# Altium PCB wakerdimmer.pcbdoc (part 2 of 2)
Units mil, origin at the board's own origin, x right, y up, seen from the top; angles counter-clockwise.
Board outline 8825.01 x 3314.36 mil, 2 copper layers (Top Layer, Bottom Layer); 48 components, 82 nets, 207 pads, 61 vias.
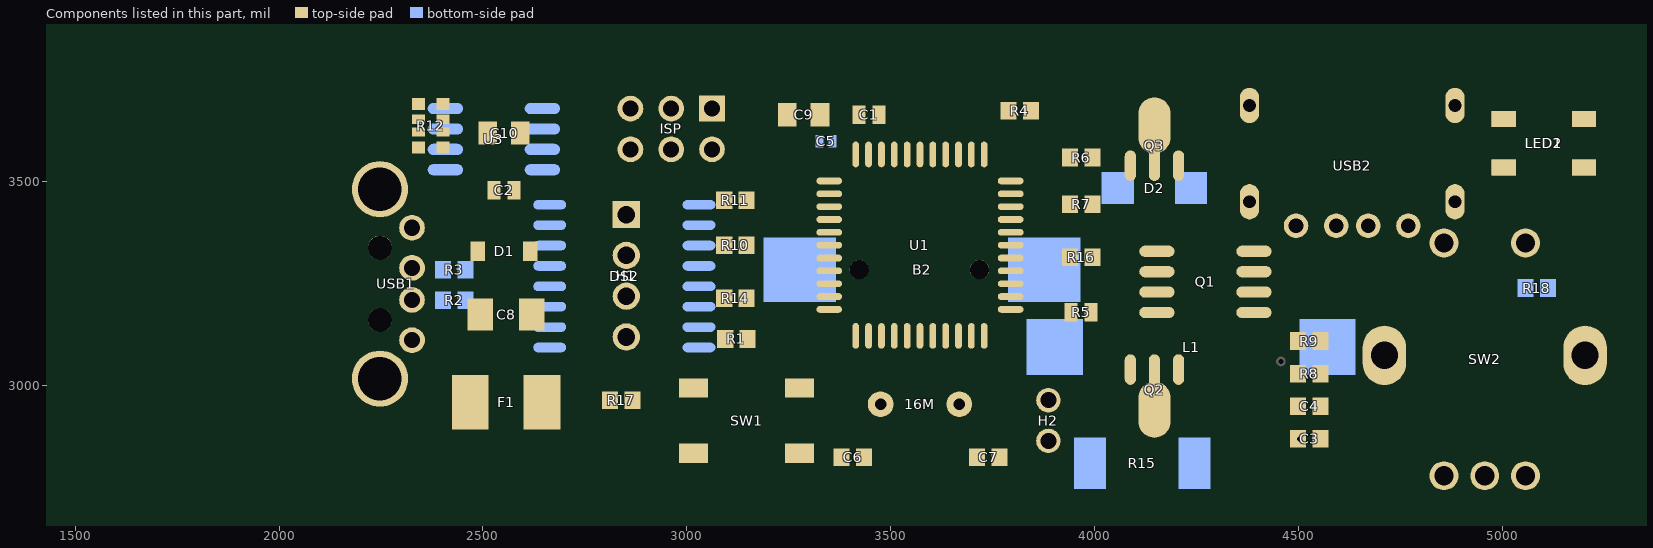
[diagram p2: the components of this part, seen from the top]

## Other copper (continued)
Bottom Layer:
  region net VCC: 2324.06,3079.23 2357.49,3112.62 2374.04,3097.99 2338.67,3062.66
  region net USB1_2: 2346.81,3232.76 2346.76,3185.51 2368.83,3205.11 2368.84,3213.11
  region net USB1_3: 2346.91,3311.46 2346.85,3264.21 2365.46,3283.81 2365.47,3291.81
  region net U1_13: 2850.51,3649.06 2833.85,3693.27 2819.22,3669.55 2823.87,3657.22
  region net U1_10: 2959.7,3547.08 2993.11,3580.48 2996.23,3552.43 2987.75,3543.95
  region net U1_9: 2959.7,3647.08 2993.11,3680.48 2996.23,3652.43 2987.75,3643.95
  region net SW2_A: 4861.7,2813.14 4821.24,2778.68 4820.81,2810.89 4829.97,2818.7
  region net U1_21: 5083.25,3325.5 5030.1,3325.5 5051.67,3300.7 5061.67,3300.7
  region net DS2_16: 2849.58,3285.11 2885.07,3320.61 2886.72,3289.12 2881.06,3283.47
  region net DS2_16: 2818.27,3316.41 2853.77,3351.91 2822.99,3354.26 2815.92,3347.19
  region net FUSED: 2818.27,3220.61 2853.77,3185.11 2822.28,3183.47 2816.63,3189.12
  region net U1_20: 3856.73,2861.63 3888.55,2893.45 3860.62,2895.22 3854.96,2889.56
  region net L1_2: 4790.42,3369.39 4745.55,3372.75 4741.67,3355.38 4791.67,3351.64
  region net L1_2: 4790.56,3412.2 4745.66,3409.12 4741.67,3429.89 4791.67,3433.32
  region net U1_26: 4447.67,3050.57 4465.67,3050.57 4462.67,3042.17 4450.67,3042.17
  region net U1_26: 4457.42,3046.53 4444.69,3059.26 4442.29,3049.79 4447.95,3044.13
  region net U1_26: 4502.42,2880.49 4489.69,2867.76 4485.88,2875.82 4494.36,2884.3
  region net U1_6: 3467.66,3476.45 3485.68,3476.45 3480.67,3483.51 3472.67,3483.51
  region net VCC: 4037.02,3379.4 4037.02,3397.42 4045.42,3398.41 4045.42,3378.41
  region net VCC: 4037.02,3379.4 4037.02,3397.42 4045.42,3392.41 4045.42,3384.41
  region net VCC: 4020.07,3380.47 4038.08,3380.47 4039.07,3372.06 4019.07,3372.06
  region net SW2_A: 4663.65,2989.26 4650.92,2976.53 4658.98,2972.72 4667.47,2981.2
  region net DS2_14: 3188.65,3664.26 3175.92,3651.53 3185.39,3649.13 3191.05,3654.79
  region net U1_9: 3242.42,3550.49 3229.69,3537.76 3225.88,3545.82 3234.36,3554.3
  region net U1_10: 3203.73,3504.51 3203.73,3522.51 3195.33,3519.51 3195.33,3507.51
  region net U1_13: 2717.67,3256.45 2735.67,3256.45 2732.67,3264.85 2720.67,3264.85
  region net U1_13: 2748.65,2994.26 2735.92,2981.53 2743.98,2977.72 2752.47,2986.2
  region net U1_13: 3183.73,2854.51 3183.73,2872.51 3175.33,2869.51 3175.33,2857.51
  region net U1_12: 3902.42,3491.53 3889.69,3504.26 3885.88,3496.2 3894.36,3487.72
  region net U1_12: 3375.81,3118.98 3392.79,3113.02 3393.36,3121.72 3380.81,3126.13
  region net U1_11: 3127.67,3551.45 3145.67,3551.45 3142.67,3559.85 3130.67,3559.85
  region net U1_11: 3127.67,3590.57 3145.67,3590.57 3142.67,3582.17 3130.67,3582.17
  region net U1_32: 4367.42,3100.49 4354.69,3087.76 4352.29,3097.23 4357.95,3102.89
  region net U1_32: 4287.67,3290.57 4305.67,3290.57 4300.67,3282.17 4292.67,3282.17
  region net U1_26: 4268.65,3027.76 4255.92,3040.49 4265.39,3042.89 4271.05,3037.23
  region net U1_4: 2553.73,3394.51 2553.73,3412.51 2545.33,3407.51 2545.33,3399.51
  region net U1_4: 2937.67,3490.57 2955.67,3490.57 2950.67,3482.17 2942.67,3482.17
  region net U1_4: 2937.67,3391.45 2955.67,3391.45 2950.67,3399.85 2942.67,3399.85
  region net U1_4: 3113.65,3397.76 3100.92,3410.49 3110.39,3412.89 3116.05,3407.23
  region net U1_4: 3273.73,3429.51 3273.73,3447.51 3265.33,3442.51 3265.33,3434.51
  region net U1_3: 2970.9,3026.53 2959.89,3040.77 2955.66,3032.51 2961.85,3024.51
  region net U1_3: 3056.98,3042.37 3051.47,3059.51 3060.94,3057.51 3063.51,3049.51
  region net U1_3: 3417.42,3446.53 3404.69,3459.26 3402.29,3449.79 3407.95,3444.13
  region net U1_36: 4938.73,3525.41 4938.73,3543.41 4930.33,3538.41 4930.33,3530.41
  region net U1_36: 3657.17,3660.57 3675.17,3660.57 3670.17,3652.17 3662.17,3652.17
  region net U1_36: 3660.56,3679.12 3677.4,3672.75 3676.06,3682.24 3667.85,3685.34
  region net DO: 5212.42,3581.53 5199.69,3594.26 5197.29,3584.79 5202.95,3579.13
  region net FUSED: 5038.73,3459.51 5038.73,3477.51 5030.33,3478.51 5030.33,3458.51
  region net DS2_15: 2777.67,3550.57 2795.67,3550.57 2791.67,3542.17 2781.67,3542.17
  region net DS2_15: 2708.73,3669.51 2708.73,3687.51 2700.33,3683.51 2700.33,3673.51
  region net DS2_16: 2747.67,3495.57 2765.67,3495.57 2761.67,3487.17 2751.67,3487.17
  region net DS2_16: 2708.73,3619.51 2708.73,3637.51 2700.33,3633.51 2700.33,3623.51
  region net FUSED: 2632.67,3496.45 2650.67,3496.45 2646.67,3504.85 2636.67,3504.85
  region net U3_3: 2327.67,3725.57 2345.67,3725.57 2341.67,3717.17 2331.67,3717.17
  region net U3_2: 2462.67,3725.57 2480.67,3725.57 2476.67,3717.17 2466.67,3717.17
  region net U3_1: 2393.65,3482.76 2380.92,3495.49 2389.69,3498.6 2396.76,3491.53
  region net U1_4: 2471.67,3305.21 2451.67,3305.21 2457.67,3317.21 2465.67,3317.21
  region net USB1_3: 2381.87,3293.51 2381.87,3273.51 2369.87,3279.51 2369.87,3287.51
  region net U1_3: 2476.47,3204.86 2467.85,3186.81 2478.45,3181.17 2482.11,3188.83
  region net USB1_2: 2381.97,3218.51 2381.97,3198.51 2369.97,3204.51 2369.97,3212.51
  region net U1_6: 3346.87,3582.81 3366.47,3582.81 3360.67,3570.81 3352.67,3570.81
  region net VCC: 3970.97,3031.01 3970.97,3156.01 3991.67,3118.51 3991.67,3068.51
  region net VCC: 3970.97,3162.41 3930.57,3162.41 3971.43,3192.41 3999.71,3192.41
  region net L1_2: 4638.07,3162.41 4513.07,3162.41 4615.21,3237.41 4685.93,3237.41
  region net L1_2: 4197.27,3522.91 4276.07,3444.11 4307.38,3518.87 4272.03,3554.22
  region net VCC: 4031.67,3444.11 4081.67,3444.11 4066.67,3414.11 4046.67,3414.11
  region net VCC: 4046.67,3444.11 4066.67,3444.11 4060.67,3432.11 4052.67,3432.11
  region net DS2_14: 3295.37,3362.21 3275.37,3362.21 3291.72,3374.21 3303.03,3374.21
  region net DS2_14: 3188.07,3253.51 3188.07,3233.51 3181.67,3239.51 3181.67,3247.51
  region net FUSED: 4978.25,3514.81 5028.25,3514.81 5013.25,3484.81 4993.25,3484.81
  region net DO: 5210.07,3554.11 5190.07,3554.11 5196.07,3566.11 5204.07,3566.11
  region net U1_21: 5069.17,3260.21 5044.17,3260.21 5051.67,3275.21 5061.67,3275.21
  region net VCC: 3949.37,2841.01 3949.37,2745.51 3874.37,2753.51 3874.37,2803.51
  region net VCC: 4027.97,2871.51 3949.37,2871.51 3966.67,2946.51 4016.67,2946.51
  region net U1_4: 2471.67,3305.16 2451.67,3305.16 2457.67,3317.16 2465.67,3317.16
  region net USB1_3: 2381.87,3293.51 2381.87,3273.51 2369.87,3279.51 2369.87,3287.51
  region net U1_3: 2476.48,3204.83 2467.7,3186.86 2478.34,3181.29 2482.05,3188.89
  region net USB1_2: 2381.99,3218.51 2381.99,3198.51 2369.99,3204.51 2369.99,3212.51
  region net U1_6: 3346.83,3582.76 3366.51,3582.76 3360.67,3570.76 3352.67,3570.76
  region net VCC: 3970.97,3031.01 3970.97,3156.01 3991.67,3118.51 3991.67,3068.51
  region net VCC: 3970.97,3162.41 3930.57,3162.41 3971.43,3192.41 3999.71,3192.41
  region net L1_2: 4638.07,3162.41 4513.07,3162.41 4615.21,3237.41 4685.93,3237.41
  region net L1_2: 4197.3,3522.88 4276.04,3444.14 4307.38,3518.87 4272.03,3554.22
  region net VCC: 4031.67,3444.14 4081.67,3444.14 4066.67,3414.14 4046.67,3414.14
  region net VCC: 4046.67,3444.14 4066.67,3444.14 4060.67,3432.14 4052.67,3432.14
  region net DS2_14: 3295.41,3362.25 3275.41,3362.25 3291.75,3374.25 3303.07,3374.25
  region net DS2_14: 3188.09,3253.51 3188.09,3233.51 3181.67,3239.51 3181.67,3247.51
  region net FUSED: 4978.25,3514.81 5028.25,3514.81 5013.25,3484.81 4993.25,3484.81
  region net DO: 5210.07,3554.11 5190.07,3554.11 5196.07,3566.11 5204.07,3566.11
  region net U1_21: 5069.17,3260.16 5044.17,3260.16 5051.67,3275.16 5061.67,3275.16
  region net VCC: 3949.32,2841.01 3949.32,2745.51 3874.32,2753.51 3874.32,2803.51
  region net VCC: 4028.02,2871.51 3949.32,2871.51 3966.67,2946.51 4016.67,2946.51
  region net DS2_15: 2861.67,3385.05 2841.67,3385.05 2847.67,3373.05 2855.67,3373.05
  region net DS2_15: 2818.21,3434.3 2835.89,3451.97 2819.98,3457.27 2812.91,3450.2
  region net DS2_14: 3064.57,3182.61 3064.57,3202.61 3076.57,3196.61 3076.57,3188.61
  region net DS2_15: 2991.02,3148.61 3010.16,3154.42 2993.82,3166.42 2982.5,3166.42
  region net DS2_16: 2992.77,3100.89 3012.46,3104.42 2996.12,3116.42 2984.8,3116.42
  region net U1_20: 2698.43,3182.61 2698.43,3202.61 2710.43,3196.61 2710.43,3188.61
  region net FUSED: 2698.43,3132.61 2698.43,3152.61 2710.43,3146.61 2710.43,3138.61
  region net U3_1: 2420.17,3514.73 2395.17,3514.73 2402.67,3509.51 2412.67,3509.51
  region net U3_2: 2443,3566.01 2443,3591.01 2458,3583.51 2458,3573.51
  region net U3_3: 2372.34,3616.01 2372.34,3641.01 2357.34,3633.51 2357.34,3623.51
  region net FUSED: 2654.17,3514.73 2629.17,3514.73 2636.67,3499.73 2646.67,3499.73
  region net DS2_16: 2681,3616.01 2681,3641.01 2696,3633.51 2696,3623.51
  region net DS2_15: 2681,3666.01 2681,3691.01 2696,3683.51 2696,3673.51
  region net DS2_14: 3064.57,3182.61 3064.57,3202.61 3076.57,3196.61 3076.57,3188.61
  region net DS2_15: 2991.02,3148.61 3010.16,3154.42 2993.82,3166.42 2982.5,3166.42
  region net DS2_16: 2992.77,3100.89 3012.46,3104.42 2996.12,3116.42 2984.8,3116.42
  region net U1_20: 2698.43,3182.61 2698.43,3202.61 2710.43,3196.61 2710.43,3188.61
  region net FUSED: 2698.43,3132.61 2698.43,3152.61 2710.43,3146.61 2710.43,3138.61
  region net U3_1: 2420.17,3514.73 2395.17,3514.73 2402.67,3509.51 2412.67,3509.51
  region net U3_2: 2443,3566.01 2443,3591.01 2458,3583.51 2458,3573.51
  region net U3_3: 2372.34,3616.01 2372.34,3641.01 2357.34,3633.51 2357.34,3623.51
  region net FUSED: 2654.17,3514.73 2629.17,3514.73 2636.67,3499.73 2646.67,3499.73
  region net DS2_16: 2681,3616.01 2681,3641.01 2696,3633.51 2696,3623.51
  region net DS2_15: 2681,3666.01 2681,3691.01 2696,3683.51 2696,3673.51

## Silkscreen, mask and mechanical layers (free items; w line width, h text height)
Top Overlay:
  text "MISO" at 3119.17,3733.51 h25 r270
  text "RST" at 2836.67,3700.41 h25
  text "SCK" at 2936.67,3700.41 h25
  text "VCC" at 3149.37,3603.51 h25 r270
  text "MOSI" at 2971.67,3487.41 h25
  text "GND" at 2831.67,3455.41 h25
  text "TX" at 3982.77,2949.21 h25 r90
  text "RX" at 3979.17,2853.51 h25 r90
Mechanical 3:
  lines w3.94: 5554.19,2587.42 cw(c5534.51,2587.61) 5554.19,2587.8 ; 5625.05,2418.51 5664.43,2418.51 ; 5644.74,2398.83 5644.74,2438.2 ; 8999.22,1887.42 cw(c8979.54,1887.61) 8999.22,1887.8 ; 9070.08,1718.51 9109.46,1718.51 ; 9089.77,1698.83 9089.77,1738.2 ; 5411.47,2201.97 5878.01,2201.97 5878.01,2635.05 5411.47,2635.05 5411.47,2201.97 ; 5497.1,2211.82 5792.38,2211.82 5792.38,2625.2 5497.1,2625.2 5497.1,2211.82 ; 8856.5,1501.97 9323.04,1501.97 9323.04,1935.05 8856.5,1935.05 8856.5,1501.97 ; 8942.13,1511.82 9237.41,1511.82 9237.41,1925.2 8942.13,1925.2 8942.13,1511.82